# EAGLE board Stunning Densor (3) (EAGLE 9.7.0)

Size 41.91 x 44.64 mm. Coordinates in mm from the lower left corner, seen from the top.
Outline: 0,0 41.91,0 41.91,44.64 0,44.64 0,0
Copper layers (1*16): Top 0.035mm / dielectric 1.5mm / Bottom 0.035mm
Design rules "default": minimum track width 6mil, minimum drill 0.35mm, track to track 6mil, track to pad 6mil, pad to pad 6mil, via to via 6mil, smd to smd 6mil, copper to edge 40mil, drill to drill 6mil, minimum pad ring 10mil, minimum via ring 8mil, stop-mask expansion 4mil, vias tented up to drill 0mil, thermal gap 10mil

## Footprints (pad centres in the part's own frame; a part is rotated, then mirrored left to right if it is on the bottom)
BATTERY-GENERIC = drill 1.118 pad 3.15 octagon: + 2.54,0; - -2.54,0
LEDRD254W60D565H860B = drill 0.981 pad 1.581: 1 -1.27,0; 2 1.27,0
28027 = drill 1.016 long: 1 -2.54,0; 2 0,0; 3 2.54,0
RESAD1016W63L850D250B = drill 0.83 pad 1.43: 1 -5.08,0; 2 5.08,0

## Placement (x,y rotation side)
BAT1  4.5V  [BATTERY-GENERIC]  21.4,8.26 0 top
D1  RED  [LEDRD254W60D565H860B]  8.26,19.24 270 top
PIR1  PIR-SENSOR_28027  [28027]  20.95,38.29 0 top
R5  220  [RESAD1016W63L850D250B]  13.34,20.51 0 top

## Library data of the parts
BAT1 PIR1 R5 = Tinkercad
D1 = Tinkercad; CATEGORY: Opto-Electronic; SUB-CATEGORY: LED; VALUE: LED_RED

## Nets
BAT1+: BAT1.+ PIR1.2
BAT1-: BAT1.- D1.2 PIR1.3
D1_A: D1.1 R5.1
PIR1_OUT: PIR1.1 R5.2

## Tracks (layer width: path | path; a pad name or v marks a point on that pad's centre or on a via)
BAT1+  (1 unrouted)
BAT1-  (2 unrouted)
D1_A  (1 unrouted)
PIR1_OUT  (1 unrouted)